# Altium PCB OR22 (2).PcbDoc
Units mm, origin at the board's own origin, x right, y up, seen from the top; angles counter-clockwise.
Board outline 27 x 15 mm, 2 copper layers (Top Layer, Bottom Layer), stack 1.535 mm thick; 18 components, 10 nets, 44 pads, 6 vias.
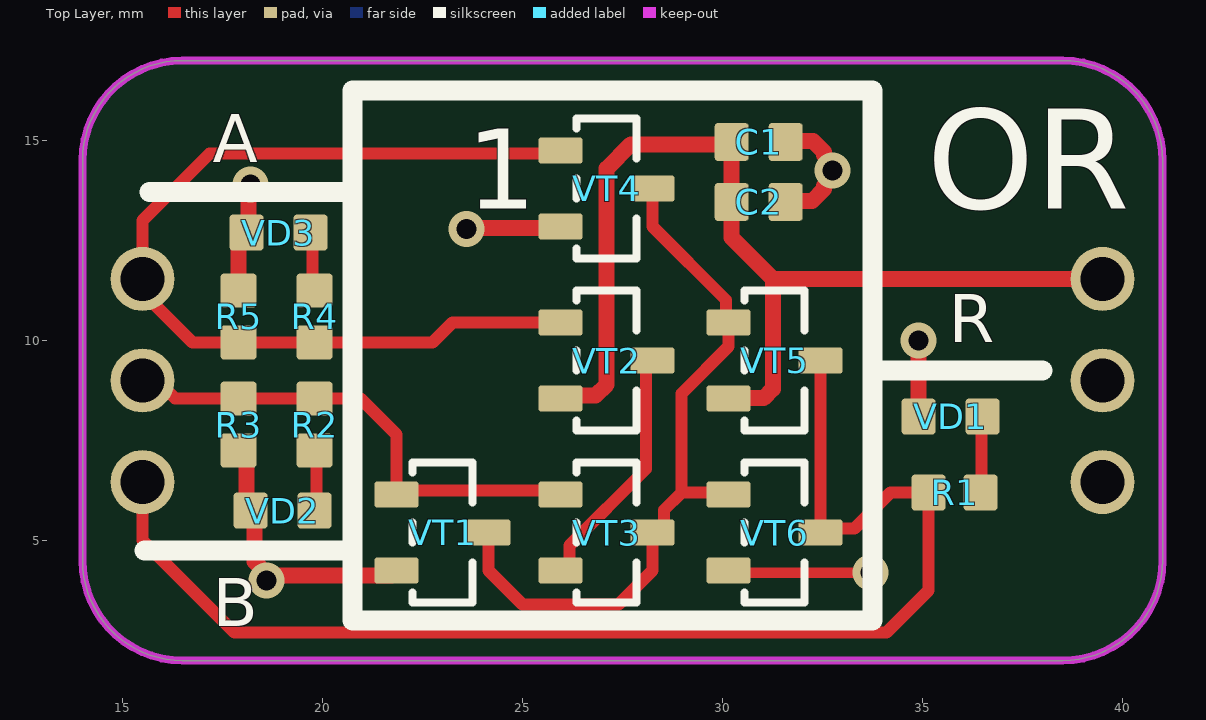
[diagram p0: Top Layer view]
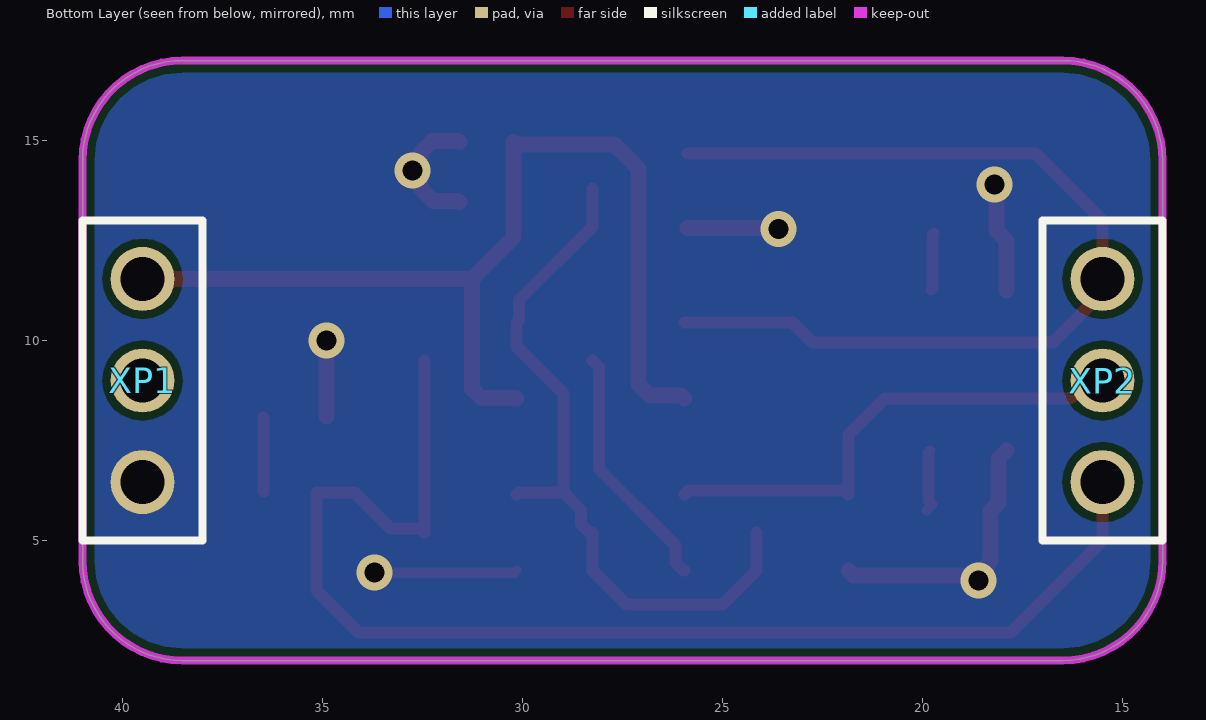
[diagram p1: Bottom Layer view, seen from below]
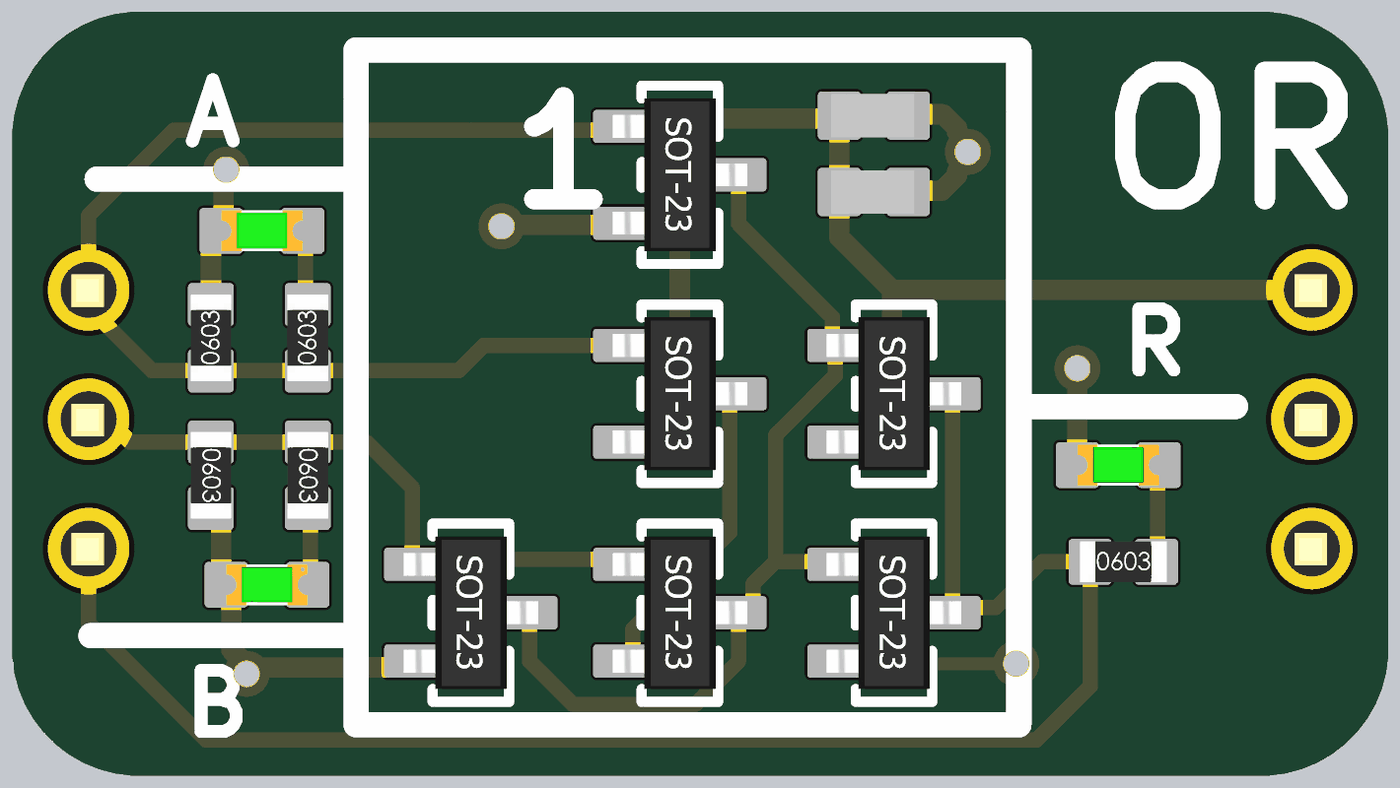
[diagram p2: 3D render of the assembled board from above, using the file's embedded part models]

## Layer stack, top to bottom
Top Solder: solder mask 0.01, Solder Resist, Dk 3.5
Top Layer: signal copper 0.018
Dielectric 1: dielectric 1.499, FR-4, Dk 4.3
Bottom Layer: signal copper 0.018
Bottom Solder: solder mask 0.01, Solder Resist, Dk 3.5

## Board outline
14,4.5 14,14.5 cw(c16.5,14.5) 16.5,17 38.5,17 cw(c38.5,14.5) 41,14.5 41,4.5 cw(c38.5,4.5) 38.5,2 16.5,2 cw(c16.5,4.5)

## Design rules (kind name [scope] priority, off if disabled: settings)
Clearance [All] p1: gap=0.2 ignorepadtopadclearanceinfootprint=FALSE
PolygonConnect PolygonConnect_isVia [All] p1: thpad.connectstyle=Direct thpad.reliefconductorwidth=0.254 thpad.reliefentries=4 thpad.polygonreliefangle="90 Angle" thpad.airgapwidth=0.254 smdpad.connectstyle=Relief smdpad.reliefconductorwidth=0.254 smdpad.reliefentries=4 smdpad.polygonreliefangle="90 Angle" smdpad.airgapwidth=0.254 via.connectstyle=Direct via.reliefconductorwidth=0.254 via.reliefentries=4 via.polygonreliefangle="90 Angle" via.airgapwidth=0.254
PolygonConnect [All] p2: connectstyle=Relief reliefconductorwidth=0.254 reliefentries=4 polygonreliefangle="90 Angle" airgapwidth=0.254
RoutingVias [All] p1: holewidth=0.711 width=1.27 viastyle="Through Hole" minholewidth=0.711 minwidth=1.27 maxholewidth=0.711 maxwidth=1.27
SolderMaskExpansion [All] p1: expansion=0.102 istentingtop=FALSE
Width [All] p1: maxlimit=0.254 minlimit=0.254 preferedwidth=0.254
30 further rules are at their usual default settings.

## Classes and differential pairs
component class Sheet3: C1 C2 R1 R2 R4 R5 VD1 VD2 VD3 VT1 VT2 VT3 VT4 VT5 VT6 XP1 XP2

## Components (designator, comment, footprint, x,y, rotation, side; value= is the part's Value field where it differs from the comment)
C1 "0,1 мкФ ±5 % *  0603, CC0603JRX7R8BB104" K10-79_1.6_0.8(0603) 30.905,14.963 r180 top value="0,1 мк"
C2 "0,01 мкФ ±10 % *  0603, CC0603KPX7R8BB103" K10-79_1.6_0.8(0603) 30.905,13.463 r180 top value="0,01 мк"
R1 "1 кОм ±5 % 0603, RC0603JR-071KL" P1-12-0.1(0603) 35.8,6.2 r0 top value="1 к"
R2 "1 кОм ±5 % 0603, RC0603JR-071KL" P1-12-0.1(0603) 19.8,7.9 r270 top value="1 к"
R3 "1 МОм ±5 % 0603, RC0603JR-071KL" P1-12-0.1(0603) 17.9,7.9 r270 top value="1 М"
R4 "1 кОм ±5 % 0603, RC0603JR-071KL" P1-12-0.1(0603) 19.8,10.6 r90 top value="1 к"
R5 "1 МОм ±5 % 0603, RC0603JR-071KL" P1-12-0.1(0603) 17.9,10.6 r90 top value="1 М"
VD1 "VD - Светодиод" "LED 0603" 35.7,8.1 r180 top value=GNL-0805UBC-TL
VD2 "VD - Светодиод" "LED 0603" 19,5.75 r180 top value=GNL-0805UBC-TL
VD3 "VD - Светодиод" "LED 0603" 18.9,12.7 r180 top value=GNL-0805UBC-TL
VT1 "VT - Полевой транзистор N канал (MOSFET_N)" SOT23(KT-46) 23,5.2 r270 top
VT2 "VT - Полевой транзистор P канал (MOSFET_P)" SOT23(KT-46) 27.1,9.5 r270 top
VT3 "VT - Полевой транзистор P канал (MOSFET_P)" SOT23(KT-46) 27.1,5.2 r270 top
VT4 "VT - Полевой транзистор N канал (MOSFET_N)" SOT23(KT-46) 27.1,13.8 r270 top
VT5 "VT - Полевой транзистор P канал (MOSFET_P)" SOT23(KT-46) 31.3,9.5 r270 top
VT6 "VT - Полевой транзистор N канал (MOSFET_N)" SOT23(KT-46) 31.3,5.2 r270 top
XP1 "Вилка PLL1.27-1x3 RUICHI" PCBComponent_1 39.5,9 r0 bottom value=PLL2-3
XP2 "KONT_POLE_POWER" PCBComponent_1 15.5,9 r0 bottom value=PLL2-3

## Footprints (in the part's own frame and the unit in brackets; to place one, negate y for a bottom-side part, rotate by r counter-clockwise, add the part's x,y. Pads: shape width x height; smd on the part's side, far side on the other; paste and mask are expansions set on the pad)
K10-79_1.6_0.8(0603) [mm]
  rrect20% 0.85x0.95 smd mask+0.05: 1(-0.675,0) 2(0.675,0)
  body extent -0.8,-0.42 0.84,0.43, height 0.41
"LED 0603" [mm]
  rrect20% 0.85x0.9 smd mask+0.05: 1(-0.8,0) 2(0.8,0)
  body extent -0.8,-0.4 0.8,0.4, height 0.6
P1-12-0.1(0603) [mm]
  rrect20% 0.85x0.9 smd mask+0.05: 1(-0.65,0) 2(0.65,0)
  Top Layer pour cut-out: -0.225,0.4 0.225,0.4 0.225,-0.4 -0.225,-0.4
  body extent -0.85,-0.4 0.85,0.4, height 0.56
PCBComponent_1 [mm]
  round 1.6 hole 1.1: 1(0,-2.54) 2(0,0) 3(0,2.54)
  silkscreen extent -1.5,-4 1.5,4, body extent -1.29,-3.8 1.25,3.82, height 8.54
SOT23(KT-46) [mm]
  rrect20% 0.65x1.1 smd mask+0.05: 1(-0.95,-1.15) 2(0.95,-1.15) 3(0,1.15)
  silkscreen extent -1.75,-0.75 1.75,0.75, body extent -1.5,-1.32 1.5,1.32, height 1.08

## Part data
C1: library part "C - Конденсатор", Package=0603, PartNumber=CC0603JRX7R8BB104, Tolerance="5 %", Company=Yageo
C2: library part "C - Конденсатор", Package=0603, PartNumber=CC0603KPX7R8BB103, Tolerance="10 %", Company=Yageo
R1 R2 R3 R4 R5: library part "R - Резистор", Package=0603, PartNumber=RC0603JR-071KL, Tolerance="5 %", Company=Yageo
VD1 VD2 VD3: Package=0603, PartNumber=GNL-0805UBC-TL, Company=G-nor
VT1 VT2 VT3 VT4 VT5 VT6: "VT"
XP1 XP2: library part "X - Контактное поле х3", PartNumber=PLL2-3, Company=RUICHI
  XP1: 1=Питание, 2=-, 3=Общий
  XP2: 1="Вход 1", 2="Вход 2", 3=Выход

## Via types
v1: diameter 0.9, hole 0.5, Top Layer to Bottom Layer, tented both sides, 6 vias

## Nets (pads, with @x,y where several pads share a name; then routed paths per layer and width w, separated by ;. In a path a pad name is that pad's centre, name@x,y a point inside that pad or via, vN(x,y) a via of type N, cw(c..) or ccw(c..) an arc to the next point about the centre after c; other vN are vias at no path point)
A_IN: R4.1 R5.1 VT2.1 VT4.1 XP2.1 | length 24
  Top Layer w0.3: VT4.1@25.877,14.677 17.177,14.677 15.5,13 XP2.1 15.5,11.2 16.75,9.95 R5.1 R4.1 22.75,9.95 23.25,10.45 VT2.1
B_IN: R2.1 R3.1 VT1.1 VT3.1 XP2.2 | length 12.6
  Top Layer w0.3: XP2.2 15.864,9 16.314,8.55 R3.1 R2.1 20.95,8.55 21.85,7.65 VT1.1 21.95,6.25 25.85,6.25 VT3.1
GND: C1.1 C2.1 R3.2 R5.2 VD1.2 VD2.2 VD3.2 VT1.2 VT4.2 VT6.2 XP1.3 | length 20.6
  Top Layer w0.254: v1(23.6,12.787) 23.6,12.8 v1@23.619,12.819 ; VT4.2@25.881,12.819 25.913,12.85 VT4.2 ; VT6.2 30.206,4.194 v1@33.694,4.194
  Top Layer w0.4: R3.2 18.1,7.05 18.1,5.95 18.3,5.75 18.3,4.475 18.6,4.175 v1@18.6,4.123 ; R5.2 17.9,12.5 VD3.2 ; VD3.2@18.15,12.75 18.15,13.85 v1(18.2,13.9) ; v1(18.6,4) 18.687,4.087 18.723,4.123 20.723,4.123 20.727,4.127 21.727,4.127 VT1.2 ; v1@23.619,12.819 VT4.2@25.881,12.819 ; C2.1 31.604,13.487 32.237,13.487 32.541,13.791 32.541,13.867 32.75,14.075 v1(32.75,14.25) 32.75,14.425 32.541,14.633 32.541,14.709 32.263,14.987 31.604,14.987 C1.1 ; VD1.2 v1(34.9,10)
  other v1: 33.7,4.2
NetR1_2: R1.2 VD1.1 | length 1.9
  Top Layer w0.254: R1.2 R1.2@36.475,6.225 ; VD1.1@36.475,8.075 VD1.1
  Top Layer w0.3: R1.2@36.475,6.225 VD1.1@36.475,8.075
NetR2_2: R2.2 VD2.1 | length 1.6
  Top Layer w0.254: R2.2 R2.2@19.85,7.2 ; VD2.1@19.85,6 19.75,5.9 VD2.1@19.9,5.75
  Top Layer w0.3: VD2.1@19.85,6 R2.2@19.85,7.2
NetR4_2: R4.2 VD3.1 | length 1.5
  Top Layer w0.254: VD3.1 VD3.1@19.75,12.65 ; R4.2@19.75,11.3 R4.2
  Top Layer w0.3: R4.2@19.75,11.3 VD3.1@19.75,12.65
NetVT1_1: VT1.3 VT3.3 VT4.3 VT5.1 VT6.1 | length 18.1
  Top Layer w0.3: VT1.3 24.15,4.25 25,3.4 27.4,3.4 28.25,4.25 VT3.3 28.334,5.2 28.532,5.398 28.532,5.757 28.977,6.202 ; VT4.3 28.25,12.85 30.093,11.007 30.093,10.507 VT5.1 30.15,9.85 28.977,8.677 28.977,6.202 ; VT6.1 30.098,6.202 28.977,6.202
NetVT2_2: VT2.3 VT3.2 | length 6.2
  Top Layer w0.3: VT3.2 25.977,4.25 26.175,4.448 26.175,4.875 28.082,6.782 28.082,9.332 VT2.3
R_OUT: R1.1 VT5.3 VT6.3 XP2.3 | length 32.3
  Top Layer w0.3: XP2.3 15.5,5 17.8,2.7 34.1,2.7 35.15,3.75 R1.1 34.2,6.2 33.3,5.3 32.55,5.3 VT6.3 ; VT6.3@32.45,5.3 VT5.3
Vdd: C1.2 C2.2 VT2.2 VT5.2 XP1.1 | length 26.1
  Top Layer w0.4: VT2.2 26.02,8.62 26.82,8.62 27.1,8.9 27.1,14.3 27.706,14.906 30.173,14.906 C1.2 C2.2 30.23,12.57 31.26,11.54 ; VT5.2 30.16,8.56 31.026,8.56 31.26,8.794 31.26,11.54 ; XP1.1 31.26,11.54
pads on no net: XP1.2

## Polygon pours and split planes (outlines as drawn)
GND on Bottom Layer "GND_L02_P005" (solid, remove dead copper, pour order 5): 13.208,14.351 cw(c15.748,14.351) 15.748,16.891 44.45,16.891 cw(c44.45,14.351) 46.99,14.351 46.99,3.556 cw(c44.45,3.556) 44.45,1.016 15.748,1.016 cw(c15.748,3.556) 13.208,3.556

## Keep-outs
Keep-Out Layer:
  the board outline again, w0.2

## Silkscreen, mask and mechanical layers (free items; w line width, h text height)
Top Overlay:
  lines w0.5: 15.547,4.75 20.5,4.75 ; 15.669,13.716 20.622,13.716 ; 34,9.25 38,9.25 ; 20.75,3 33.75,3 33.75,15 33.75,16.25 20.75,16.25 20.75,15.25 20.75,3
  text "A" at 17.254,14.454 h1.2
  text "1" at 23.6,13.3 h2
  text "OR" at 35.1,13.3 h2.5
  text "R" at 35.654,9.954 h1.2
  text "B" at 17.254,2.854 h1.2
Mechanical 1:
  the board outline again, w0.15
Mechanical 5:
  lines w0.1: 21.204,12.7 21.75,12.7 ; 39.925,10.2 40.3,10.2
  lines w0.2: 5,11.5 5.04,11.54 40.5,11.54

## Dimensions
41,17 to 39.5,11.54 on Mechanical 5
15.5,11.54 to 39.5,11.54 on Mechanical 5